# EAGLE board stencil (EAGLE 9.6.2)
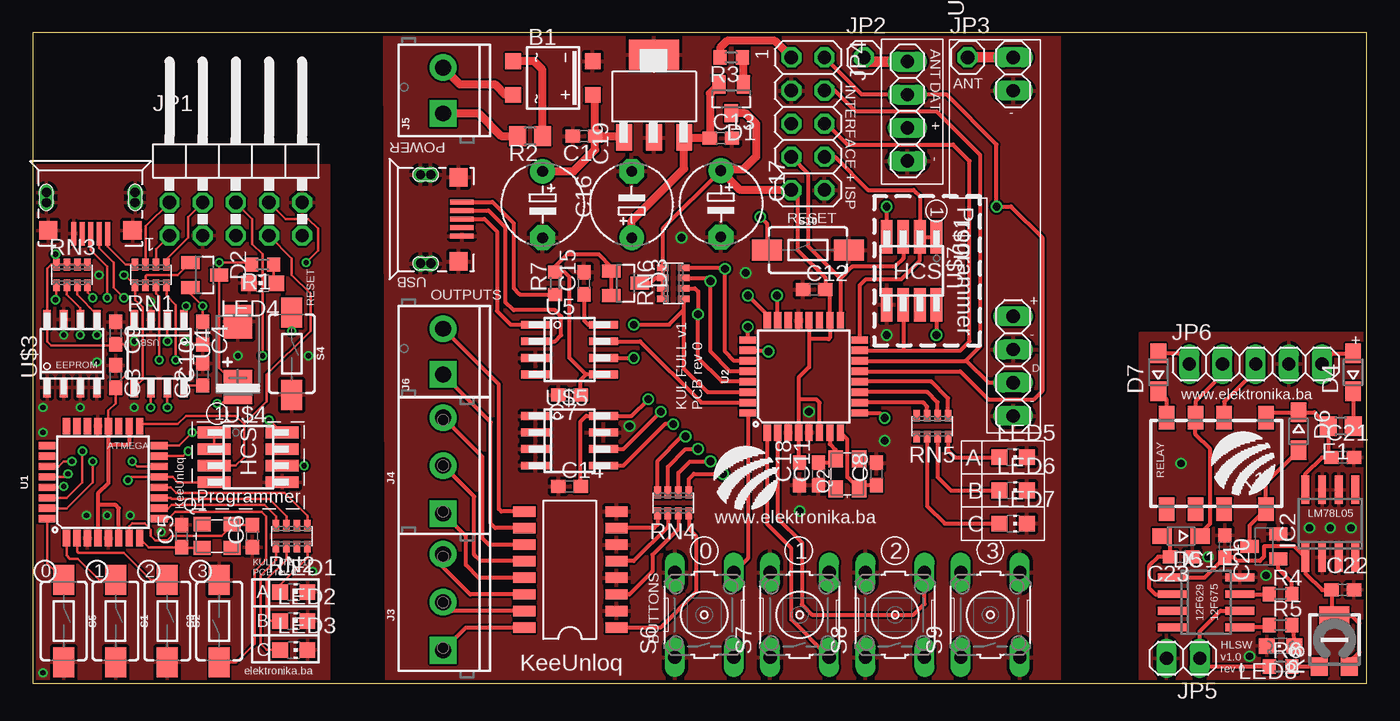
[diagram p0: board, top side]
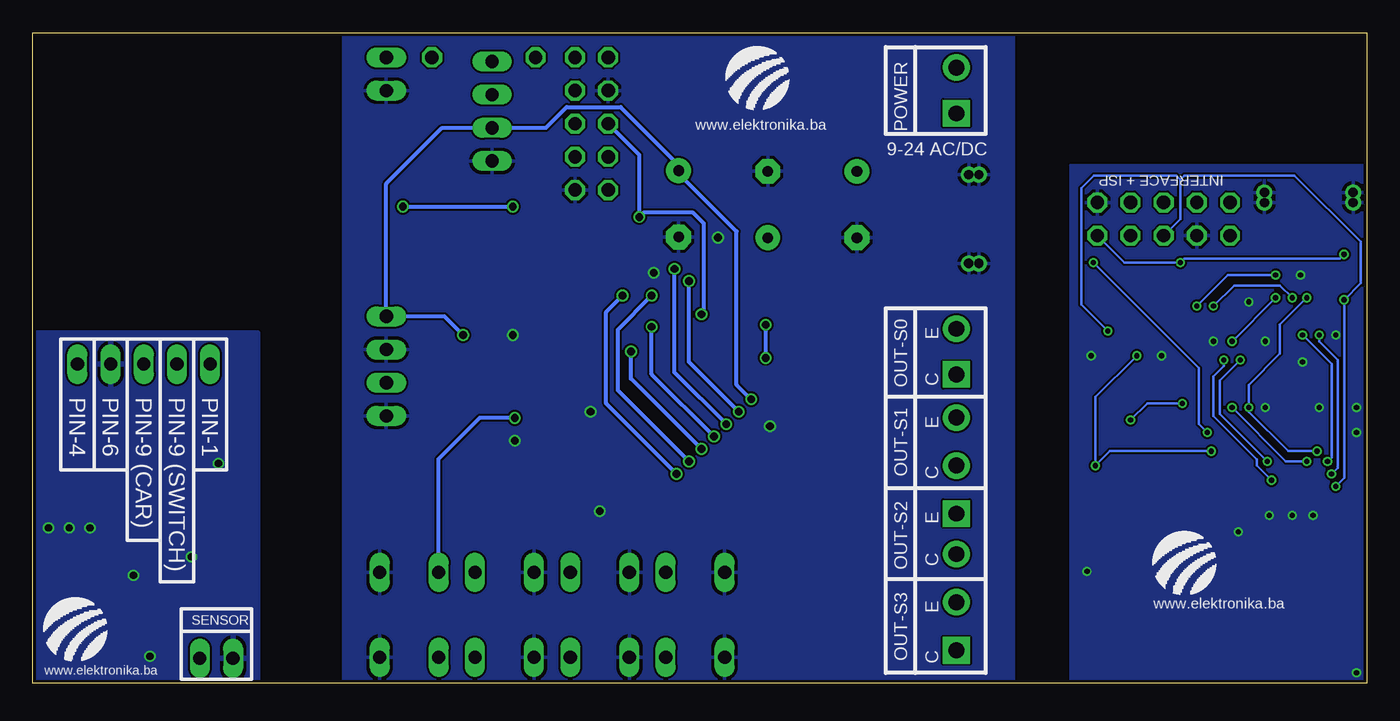
[diagram p1: board, bottom side, seen from below]

Size 102.17 x 49.84 mm. Coordinates in mm from the lower left corner, seen from the top.
Outline: 27.77,0 0,0 0,49.84 27.77,49.84
Outline: 27.78,0 82.86,0
Outline: 82.86,49.84 27.78,49.84
Outline: 82.87,0 102.17,0 102.17,49.84 82.87,49.84
Copper layers (1*16): Top 0.035mm / dielectric 1.5mm / Bottom 0.035mm
Design rules "Fusion_eagle_rule_v1.1": minimum track width 6mil, minimum drill 12mil, track to track 6mil, track to pad 6mil, pad to pad 6mil, via to via 6mil, smd to smd 0mil, copper to edge 10mil, drill to drill 10mil, minimum pad ring 10mil, minimum via ring 6mil, stop-mask expansion 2mil, vias tented up to drill 100mil, thermal gap 10mil

## Footprints (pad centres in the part's own frame; a part is rotated, then mirrored left to right if it is on the bottom)
SOIC-4 = smd 1.2 x 1.2: + 1.3,3.05; - -1.3,3.05; ~1 -1.3,-3.05; ~2 1.3,-3.05
C0603 = smd 1.1 x 1: 1 -0.85,0; 2 0.85,0
CT6032 = smd 2.6 x 2.2: + -2.5,0; - 2.5,0
E5-6 = drill 0.813 pad 1.905: + -2.54,0 | drill 0.813 pad 1.905 octagon: - 2.54,0
SOT23 = smd 1 x 1.4: 1 -0.95,-1.1; 2 0.95,-1.1; 3 0,1.1
SOD323-W = smd 1.5 x 1.2: A 1.45,0; C -1.45,0
R0805 = smd 1.3 x 1.5: 1 -0.95,0; 2 0.95,0
SO-08 = smd 0.6 x 2.2: 1 -1.905,-2.6; 2 -0.635,-2.6; 3 0.635,-2.6; 4 1.905,-2.6; 5 1.905,2.6; 6 0.635,2.6; 7 -0.635,2.6; 8 -1.905,2.6
SO08 = smd 0.6 x 2.2: 1 -1.905,-2.6; 2 -0.635,-2.6; 3 0.635,-2.6; 4 1.905,-2.6; 5 1.905,2.6; 6 0.635,2.6; 7 -0.635,2.6; 8 -1.905,2.6
C40951_USB = smd 1.8 x 0.4: D+ -2.55,0; D- -2.55,-0.65; GND -2.55,1.3; ID -2.55,0.65; VBUS -2.55,-1.3 | drill 0.72 pad 1.2: P$1 -0.17,3.4; P$2 0.61,3.4; P$3 -0.17,-3.4; P$4 0.61,-3.4 | smd 1.4 x 1.4: SHIELD1 -2.3,3.25; SHIELD2 -2.3,-3.2
SCREWTERMINAL-3.5MM-3_LOCK.007S = drill 1.2 pad 2.032 square: 1 -0.178,0 | drill 1.2 pad 2.032: 2 3.5,0; 3 7.178,0
SCREWTERMINAL-3.5MM-2 = drill 1.2 pad 2.032 square: 1 0,0 | drill 1.2 pad 2.032: 2 3.5,0
2X05/90 = drill 1.016 octagon: 1 -5.08,-6.35; 2 -5.08,-3.81; 3 -2.54,-6.35; 4 -2.54,-3.81; 5 0,-6.35; 6 0,-3.81; 7 2.54,-6.35; 8 2.54,-3.81; 9 5.08,-6.35; 10 5.08,-3.81
1X01 = drill 1.016 octagon: 1 0,0
2X05 = drill 1.016 octagon: 1 -5.08,-1.27; 2 -5.08,1.27; 3 -2.54,-1.27; 4 -2.54,1.27; 5 0,-1.27; 6 0,1.27; 7 2.54,-1.27; 8 2.54,1.27; 9 5.08,-1.27; 10 5.08,1.27
1X02 = drill 1.016 long: 1 -1.27,0; 2 1.27,0
1X05 = drill 1.016 long: 1 -5.08,0; 2 -2.54,0; 3 0,0; 4 2.54,0; 5 5.08,0
G6K-2F-Y = smd 1.2 x 1.8: 1 -3.8,-3.5; 2 -0.6,-3.5; 3 1.6,-3.5; 4 3.8,-3.5; 5 3.8,3.5; 6 1.6,3.5; 7 -0.6,3.5; 8 -3.8,3.5
CHIP-LED0805 = smd 1.2 x 1.2: A 0,-1.05; C 0,1.05
CHIPLED_0805 = smd 1.2 x 1.2: A 0,-1.05; C 0,1.05
3.2X2.5_KX-7 = smd 1.3 x 1.1: 1 -1.15,-0.9; 2 1.15,-0.9; 3 1.15,0.9; 4 -1.15,0.9
R0603 = smd 1 x 1.1: 1 -0.85,0; 2 0.85,0
RTRIMCVR42A = smd 1.3 x 1.4: 1 -1.15,-2.05; 3 1.15,-2.05 | smd 2.3 x 1.5: 2 0,1.8
CTS742C083 = smd 0.5 x 0.9: 1 -1.2,-0.8; 2 -0.4,-0.8; 3 0.4,-0.8; 4 1.2,-0.8; 5 1.2,0.8; 6 0.4,0.8; 7 -0.4,0.8; 8 -1.2,0.8
TACTILE_SWITCH_SMD_6.0X3.5MM = smd 2.3 x 1.6: 1 -3.15,0; 2 3.15,0
B3F-10XX = drill 1.016 long: 1 -3.251,2.261; 2 3.251,2.261; 3 -3.251,-2.261; 4 3.251,-2.261
SOT23-BEC = smd 1 x 1.4: B -0.95,-1.1; C 0,1.1; E 0.95,-1.1
TQFP32-08 = smd 1.27 x 0.559: 1 -4.293,2.8; 2 -4.293,2; 3 -4.293,1.2; 4 -4.293,0.4; 5 -4.293,-0.4; 6 -4.293,-1.2; 7 -4.293,-2; 8 -4.293,-2.8; 17 4.293,-2.8; 18 4.293,-2; 19 4.293,-1.2; 20 4.293,-0.4; 21 4.293,0.4; 22 4.293,1.2; 23 4.293,2; 24 4.293,2.8 | smd 0.559 x 1.27: 9 -2.8,-4.293; 10 -2,-4.293; 11 -1.2,-4.293; 12 -0.4,-4.293; 13 0.4,-4.293; 14 1.2,-4.293; 15 2,-4.293; 16 2.8,-4.293; 25 2.8,4.293; 26 2,4.293; 27 1.2,4.293; 28 0.4,4.293; 29 -0.4,4.293; 30 -1.2,4.293; 31 -2,4.293; 32 -2.8,4.293
C308597_LDO = smd 2.3 x 3.8: PGND1 -3.232,-0.036 | smd 2 x 1.2: PGND2 3.118,-0.036; PIN 3.118,-2.336; POUT 3.118,2.264
SOIC8_MINI = smd 0.584 x 1.524: 1 -1.905,-2.6; 2 -0.635,-2.6; 3 0.635,-2.6; 4 1.905,-2.6; 5 1.905,2.6; 6 0.635,2.6; 7 -0.635,2.6; 8 -1.905,2.6
SOIC8 = smd 0.6 x 2.2: 1 -1.905,-2.6; 2 -0.635,-2.6; 3 0.635,-2.6; 4 1.905,-2.6; 5 1.905,2.6; 6 0.635,2.6; 7 -0.635,2.6; 8 -1.905,2.6
SOP-16_4.4MM = smd 0.8 x 1.7: P1 -4.476,-3.591; P2 -3.201,-3.591; P3 -1.926,-3.591; P4 -0.651,-3.591; P5 0.624,-3.591; P6 1.874,-3.591; P7 3.149,-3.591; P8 4.424,-3.591; P9 4.424,3.458; P10 3.149,3.458; P11 1.874,3.458; P12 0.624,3.458; P13 -0.651,3.458; P14 -1.926,3.458; P15 -3.201,3.458; P16 -4.476,3.458
DL-RXC2015 = drill 1.016 long: PANT 27.46,0; PCE 5.08,0; PDATA 2.54,0; PGND1 24.92,0; PGND2 0,0; PVCC 7.62,0
DL-TX1 = drill 1.016 long: PANT 0,0; PDATA 2.54,0; PGND 7.62,0; PVDD 5.08,0
SOIC8_BIG = smd 0.889 x 2.54: 1 -1.905,-2.6; 2 -0.635,-2.6; 3 0.635,-2.6; 4 1.905,-2.6; 5 1.905,2.6; 6 0.635,2.6; 7 -0.635,2.6; 8 -1.905,2.6

## Placement (x,y rotation side)
B1  MB6S  [SOIC-4]  39.85,46.35 270 top
C1  100n  [C0603]  42.23,41.91 180 top
C2  47u/16V  [CT6032]  15.72,25.19 90 top
C3  100n  [C0603]  6.35,23.5 270 top
C4  100n  [C0603]  13.02,26.83 270 top
C5  22p  [C0603]  11.43,11.27 90 top
C6  22p  [C0603]  16.83,11.27 90 top
C7  100n  [C0603]  41.12,22.07 180 top
C8  22p  [C0603]  64.61,16.03 90 top
C9  100n  [C0603]  6.35,26.83 270 top
C10  100n  [C0603]  13.02,23.65 90 top
C11  22p  [C0603]  60.17,16.03 90 top
C12  100n  [C0603]  59.85,30.16 0 top
C13  100n  [C0603]  52.7,41.75 0 top
C14  100n  [C0603]  41.12,15.08 0 top
C15  100n  [C0603]  42.23,30.64 90 top
C16  100u/50V  [E5-6]  39.05,36.67 270 top
C17  100u/50V  [E5-6]  52.7,36.73 270 top
C18  100n  [C0603]  58.74,16.03 90 top
C19  100u/50V  [E5-6]  45.88,36.67 90 top
C20  100n  [C0603]  91.28,10.48 270 top
C21  470n  [C0603]  100.33,17.3 0 top
C22  330n  [C0603]  100.33,7.14 0 top
C23  100n  [C0603]  87.95,9.68 180 top
D1  SDM20E40C-7-F (BAS40-05)  [SOT23]  53.5,44.77 180 top
D2  SDM20E40C-7-F (BAS40-05)  [SOT23]  13.18,31.27 270 top
D3  SDM20E40C-7-F (BAS40-05)  [SOT23]  45.4,30.64 270 top
D4  1N4148  [SOD323-W]  101.12,23.81 90 top
D5  1N4148  [SOD323-W]  87.95,11.27 180 top
D6  1N4148  [SOD323-W]  96.95,19.3 270 top
D7  1N4148  [SOD323-W]  86.2,23.81 90 top
F1  PTC 0.1A 15V  [R0805]  100.17,19.68 180 top
IC1  PIC12F675SN  [SO-08]  89.85,6.19 270 top
IC2  78L05SMD  [SO08]  99.38,12.22 0 top
J1  [C40951_USB]  4.45,36.99 90 top
J2  [C40951_USB]  30.32,35.56 180 top
J3  [SCREWTERMINAL-3.5MM-3_LOCK.007S]  31.43,2.7 90 top
J4  [SCREWTERMINAL-3.5MM-3_LOCK.007S]  31.43,13.18 90 top
J5  [SCREWTERMINAL-3.5MM-2]  31.43,43.66 90 top
J6  [SCREWTERMINAL-3.5MM-2]  31.43,23.65 90 top
JP1  [2X05/90]  15.56,40.64 0 top
JP2  [1X01]  63.66,47.94 0 top
JP3  [1X01]  71.6,47.94 0 top
JP4  [2X05]  59.37,42.86 270 top
JP5  [1X02]  88.11,1.91 180 top
JP6  [1X05]  93.66,24.45 0 top
K1  G6K-2F-Y  [G6K-2F-Y]  90.65,16.83 180 top
LED1  [CHIP-LED0805]  20,6.99 270 top
LED2  [CHIP-LED0805]  20,4.76 270 top
LED3  [CHIP-LED0805]  20,2.54 270 top
LED4  [CHIP-LED0805]  17.62,30.64 90 top
LED5  [CHIP-LED0805]  75.09,17.3 270 top
LED6  [CHIP-LED0805]  75.09,14.76 270 top
LED7  [CHIP-LED0805]  75.09,12.22 270 top
LED8  RED  [CHIPLED_0805]  95.57,2.86 90 top
Q1  16Mz  [3.2X2.5_KX-7]  14.13,11.27 0 top
Q2  16 MHz  [3.2X2.5_KX-7]  62.39,16.03 90 top
R1  1k  [R0603]  17.62,32.07 180 top
R2  22  [R0805]  38.1,41.91 180 top
R3  10  [R0603]  53.5,47.94 180 top
R4  2k2  [R0603]  95.57,6.83 0 top
R5  1k  [R0603]  95.57,4.45 0 top
R6  1k  [R0603]  95.57,1.27 0 top
R7  10  [R0603]  40.01,30.64 90 top
R8  15k  [RTRIMCVR42A]  99.69,3.33 0 top
RN1  10  [CTS742C083]  9.05,31.27 180 top
RN2  220  [CTS742C083]  19.84,11.27 180 top
RN3  4k7  [CTS742C083]  3.02,31.27 0 top
RN4  220  [CTS742C083]  49.05,13.81 180 top
RN5  220  [CTS742C083]  68.9,19.68 180 top
RN6  4k7  [CTS742C083]  49.05,30.64 90 top
S1  MOMENTARY-SWITCH-SPST-SMD-6.0X3.5MM  [TACTILE_SWITCH_SMD_6.0X3.5MM]  6.35,4.76 270 top
S2  MOMENTARY-SWITCH-SPST-SMD-6.0X3.5MM  [TACTILE_SWITCH_SMD_6.0X3.5MM]  10.32,4.76 270 top
S3  MOMENTARY-SWITCH-SPST-SMD-6.0X3.5MM  [TACTILE_SWITCH_SMD_6.0X3.5MM]  14.29,4.76 90 top
S4  MOMENTARY-SWITCH-SPST-SMD-6.0X3.5MM  [TACTILE_SWITCH_SMD_6.0X3.5MM]  19.84,25.24 270 top
S5  MOMENTARY-SWITCH-SPST-SMD-6.0X3.5MM  [TACTILE_SWITCH_SMD_6.0X3.5MM]  2.38,4.76 270 top
S6  [B3F-10XX]  51.44,5.24 90 top
S7  [B3F-10XX]  58.74,5.24 90 top
S8  [B3F-10XX]  66.04,5.24 90 top
S9  [B3F-10XX]  73.34,5.24 90 top
S10  MOMENTARY-SWITCH-SPST-SMD-6.0X3.5MM  [TACTILE_SWITCH_SMD_6.0X3.5MM]  59.37,33.18 0 top
T1  BC546  [SOT23-BEC]  94.3,10.48 90 top
U1  ATMEGA328P_TQFP  [TQFP32-08]  5.4,15.4 90 top
U2  ATMEGA328P_TQFP  [TQFP32-08]  59.05,23.5 90 top
U3  BD450M2FP3-CE2  [C308597_LDO]  47.62,44.93 270 top
U4  CH330NMINI  [SOIC8_MINI]  9.68,25.24 180 top
U5  CH330N  [SOIC8]  41.12,25.56 270 top
U6  LTV-247  [SOP-16_4.4MM]  41.12,8.73 90 top
U$1  DL-RXC2015  [DL-RXC2015]  75.09,20.48 90 top
U$2  DL-TX1  [DL-TX1]  66.99,47.62 270 top
U$3  EEPROMMINI  [SOIC8_MINI]  3.02,25.24 0 top
U$4  SOIC8-BIG  [SOIC8_BIG]  16.51,17.3 270 top
U$5  EEPROM  [SOIC8]  41.12,18.57 270 top
U$6  ELEKTRONIKA_BA_ELEBA_LOGO  [ELEKTRONIKA_BA_ELEBALOGO_ELEBALOGO_B_122]  13.97,9.21 0 bottom
U$7  SOIC8-BIG  [SOIC8_BIG]  67.31,31.59 180 top
U$8  ELEKTRONIKA_BA_ELEBA_LOGO-121  [ELEKTRONIKA_BA_ELEBALOGO_ELEBALOGO_B_121]  54.61,15.72 0 top
U$9  ELEKTRONIKA_BA_ELEBA_LOGO  [ELEKTRONIKA_BA_ELEBALOGO_ELEBALOGO_B_122]  46.67,46.35 0 bottom
U$10  ELEKTRONIKA_BA_ELEBA_LOGO  [ELEKTRONIKA_BA_ELEBALOGO_ELEBALOGO_B_122]  98.9,4.13 0 bottom
U$11  ELEKTRONIKA_BA_ELEBA_LOGO-121  [ELEKTRONIKA_BA_ELEBALOGO_ELEBALOGO_B_121]  92.71,16.83 0 top

## Library data of the parts
B1 = rectifier
C1-C19 = rcl; SPICEPREFIX: C
C20-C23 F1 R4-R6 = rcl
D1-D7 = diode
IC1 = microchip; MF: MICROCHIP; MPN: PIC12F675-E/SN; OC_FARNELL: 9759026; OC_NEWARK: 92C4341
IC2 = linear
J1 J2 U3-U6 U$1-U$5 U$7 = trax_832
J3 J4 = SparkFun-Connectors; PROD_ID: CONN-08288; SF_ID: PRT-08235
J5 J6 = SparkFun-Connectors; PROD_ID: CONN-08399
JP1-JP6 = pinhead
K1 = relay; MF: OMRON COMPONENTS USA; MPN: G6K-2F-Y DC3; OC_FARNELL: 1690316; OC_NEWARK: 89C6451
LED1-LED7 = led
LED8 = adafruit
Q1 Q2 = crystal-geyer_V1_0
R1-R3 R7 = rcl; SPICEPREFIX: R
R8 = resistor
RN1-RN6 = resistor-net; OC_FARNELL: unknown; OC_NEWARK: unknown
S1-S5 S10 = SparkFun-Switches; PROD_ID: SWCH-00815; SF_SKU: COM-08229
S6-S9 = trax_832; MPN: B3F-1000; OC_FARNELL: 176432; OC_NEWARK: 36M3542
T1 = transistor
U1 U2 = SparkFun-IC-Microcontroller; PROD_ID: IC-09069
U$6 U$8-U$11 = elebalogo

## Nets
1-PIN: D7.A JP6.1
4-PIN: D4.A JP6.5
9-CAR: JP6.3 K1.2
9-HLSW: D5.C JP6.2 K1.3
!ENAB: C23.2 D5.A IC1.2
+5V: C2.+ C3.2 C9.2 D2.3 JP1.9 R1.2 RN3.5 RN3.6 RN3.7 RN3.8 U1.4 U1.6 U1.18 U1.20 U$3.8 U$4.8
+5V1: C12.2 C14.2 C17.+ C18.2 D1.3 D3.3 JP4.9 RN6.5 RN6.6 RN6.7 RN6.8 U2.4 U2.6 U2.18 U2.20 U$1.PVCC U$2.PVDD U$5.8 U$7.8
+5V2: C20.2 C22.1 IC1.1 IC2.1 R8.2 R8.3
+12V: C21.1 D6.C F1.2 IC2.8 K1.1
AUX_VCC: D2.1 RN1.6
AUX_VCC1: D1.1 R3.1
BTN1: S5.1 U1.32
BTN2: S1.1 U1.1
BTN3: S2.1 U1.2
BTN4: S3.1 U1.9
BTN5: S6.4 U2.32
BTN6: S7.3 U2.1
BTN7: S8.4 U2.2
BTN8: S9.2 U2.9
GND: C2.- C3.1 C4.2 C5.2 C6.1 C9.1 C10.2 J1.GND J1.P$1 J1.P$2 J1.P$3 J1.P$4 J1.SHIELD1 J1.SHIELD2 JP1.3 JP1.10 LED1.C LED2.C LED3.C LED4.C S1.2 S2.2 S3.2 S4.2 S5.2 U1.3 U1.5 U1.21 U4.3 U$3.1 U$3.2 U$3.3 U$3.4 U$3.7 U$4.5
GND1: B1.- C1.2 C7.2 C8.2 C11.1 C12.1 C13.2 C14.1 C15.2 C16.- C17.- C18.1 C19.- J2.GND J2.P$1 J2.P$2 J2.P$3 J2.P$4 J2.SHIELD1 J2.SHIELD2 JP4.3 JP4.10 LED5.C LED6.C LED7.C S6.1 S6.2 S7.1 S7.2 S8.1 S8.2 S9.3 S9.4 S10.2 U2.3 U2.5 U2.21 U3.PGND1 U3.PGND2 U5.3 U6.P2 U6.P4 U6.P6 U6.P8 U$1.PCE U$1.PGND1 U$1.PGND2 U$2.PGND U$5.1 U$5.2 U$5.3 U$5.4 U$5.7 U$7.5
GND2: C20.1 C21.2 C22.2 C23.1 IC1.8 IC2.2 IC2.3 IC2.6 IC2.7 JP5.2 JP6.4 LED8.C T1.E
LED1: RN2.1 U1.12
LED2: RN2.3 U1.11
LED3: RN2.4 U1.10
LED4: RN5.1 U2.12
LED5: RN5.2 U2.11
LED6: RN5.3 U2.10
MISO: JP1.8 U1.16 U$4.1 U$4.2
MISO1: JP4.8 U2.16 U$7.1 U$7.2
MOSI: JP1.6 U1.15 U$4.6
MOSI1: JP4.6 U2.15 U$7.6
N$1: JP1.2 RN1.3
N$2: JP1.4 RN1.1
N$3: LED2.A RN2.6
N$4: LED1.A RN2.8
N$5: LED4.A R1.1
N$6: RN4.8 U6.P1
N$7: RN4.7 U6.P3
N$8: J1.D+ U4.1
N$9: RN4.6 U6.P5
N$10: RN4.5 U6.P7
N$11: B1.~1 R2.1
N$12: B1.~2 J5.2
N$13: B1.+ C1.1 C16.+ U3.PIN
N$14: J1.D- U4.2
N$15: C13.1 C19.+ D1.2 U3.POUT
N$16: J2.D+ U5.1
N$17: C10.1 U4.8
N$18: J2.D- U5.2
N$19: J2.VBUS R7.1
N$20: C7.1 D3.1 D3.2 R7.2 U5.5
N$21: C15.1 U5.8
N$22: J3.1 U6.P16
N$23: J3.2 U6.P15
N$24: J3.3 U6.P14
N$25: J4.1 U6.P13
N$26: J4.2 U6.P12
N$27: J4.3 U6.P11
N$28: J6.1 U6.P10
N$29: J6.2 U6.P9
N$30: RN4.1 U2.23
N$31: RN4.2 U2.24
N$32: JP2.1 U$2.PANT
N$33: JP3.1 U$1.PANT
N$34: LED3.A RN2.5
N$35: JP1.1 RN1.2
N$36: LED5.A RN5.8
N$37: LED6.A RN5.7
N$38: LED7.A RN5.6
N$39: J5.1 R2.2
N$40: JP4.1 R3.2
N$41: RN4.4 U2.25
N$42: RN4.3 U2.26
N$43: D4.C F1.1
N$44: LED8.A R5.2
N$45: IC1.6 JP5.1 R6.1
N$46: IC1.5 R5.1
N$47: R4.2 T1.B
N$48: IC1.7 R4.1
N$49: D6.A K1.8 T1.C
N$50: D7.C K1.4
N$51: R6.2 R8.1
OSC1: C6.2 Q1.3 U1.7
OSC2: C5.1 Q1.1 U1.8
OSC3: C11.2 Q2.3 U2.7
OSC4: C8.1 Q2.1 U2.8
RESET: JP1.5 RN3.1 S4.1 U1.29
RESET1: JP4.5 RN6.2 S10.1 U2.29
RF_RX: RN1.7 U1.14
RF_RX1: JP4.4 U2.14 U$1.PDATA
RF_TX: RN1.8 U1.13 U$4.4
RF_TX1: JP4.2 U2.13 U$2.PDATA U$7.4
SCK: JP1.7 U1.17 U$4.3
SCK1: JP4.7 U2.17 U$7.3
SCL: RN3.2 U1.28 U$3.6
SCL1: RN6.3 U2.28 U$5.6
SDA: RN3.3 U1.27 U$3.5
SDA1: RN6.4 U2.27 U$5.5
UART_RX: RN3.4 U1.30 U4.6
UART_RX1: RN6.1 U2.30 U5.6
UART_TX: U1.31 U4.7
UART_TX1: U2.31 U5.7
VBUS: J1.VBUS RN1.4
VBUSR: C4.1 D2.2 RN1.5 U4.5

## Tracks (layer width: path | path; a pad name or v marks a point on that pad's centre or on a via)
1-PIN
  Top 0.305: JP6.1 87.77,25.26 D7.A
4-PIN
  Top 0.305: JP6.5 99.56,25.26 D4.A
9-CAR
  Top 0.305: JP6.3 93.66,23.97 91.25,21.55 K1.2
9-HLSW
  Top 0.305: JP6.2 91.12,23.65 89.05,21.58 K1.3 89.05,19.06 90.17,17.94 90.17,12.22 89.4,11.45 D5.C
!ENAB
  Top 0.305: D5.A 87.1,10.67 C23.2 86.2,9.68 85.5,8.98 85.5,7.3 85.97,6.83 IC1.2
+5V  (via drill 0.4)
  Top 0.203: RN3.8 RN3.7 RN3.6 RN3.5 | RN3.8 1.44,32.07 1.11,31.75 U$3.8 1.11,26.19 1.43,25.88 6.25,25.88 C9.2 6.88,25.98 7.3,25.56 7.3,23.81 6.35,22.86 C3.2 6.35,21.43 5.8,20.88 U1.20 | RN3.8 1.82,32.79 v1.75,32.86 | v14.13,21.43 14.46,21.43 C2.+ 15.4,23 15.4,23.01 14.28,24.13 D2.3 14.28,32.22 v14.29,32.23 16.61,32.23 R1.2 | U$4.8 18.16,20.16 v18.1,20.16
  Top 0.305: U1.20 5.8,18.26 | 5.8,18.26 5.8,15.32 5,14.52 5,13.65 | 5,13.65 U1.4 | U1.18 7.4,18.35 7.3,18.26 5.8,18.26 | U1.6 6.6,13.4 6.35,13.65 5,13.65
  Bottom 0.203: v1.75,32.86 2.06,32.54 13.97,32.54 v14.29,32.23 18.57,32.23 JP1.9 | v14.13,21.43 16.83,21.43 v18.1,20.16
+5V1  (via drill 0.6)
  Top 0.305: C18.2 58.66,16.97 U2.4 58.66,21.75 | C14.2 41.97,20.06 42.39,20.48 U$5.8 45.88,20.48 v47.15,21.75 | RN6.6 RN6.5 48.25,34.81 C17.+ | RN6.6 RN6.7 RN6.8 | RN6.6 47.71,31.04 47.31,30.64 D3.3 | U2.20 59.45,26.35 | 59.45,26.35 59.45,24.21 58.66,23.41 58.66,21.75 | 59.45,26.35 60.96,26.35 61.05,26.45 U2.18 61.05,29.81 C12.2 60.7,31.06 58.58,33.18 58.58,37.31 JP4.9 | U2.6 60.26,21.5 60.01,21.75 58.66,21.75 | U$7.8 v69.22,26.67
  Top 0.61: D1.3 54.6,43.67 55.4,42.86 55.4,40.32 54.45,39.37 52.81,39.37 C17.+ 54.19,37.78 JP4.9
  Bottom 0.305: v47.15,21.75 48.26,22.86 48.26,34.61 52.7,39.05 C17.+ 52.7,39.69 57.15,44.13 61.28,44.13 62.87,42.55 U$2.PVDD 70.8,42.55 75.09,38.26 U$1.PVCC 70.64,28.1 v69.22,26.67
+5V2
  Top 0.305: R8.3 100.84,1.63 101.6,2.38 101.6,4.6 101.07,5.13 R8.2 99.48,5.35 C22.1 98.74,7.14 97.47,8.41 IC2.1 96.62,10.48 94.3,10.48 94.3,9.68 93.98,9.37 92.23,9.37 91.97,9.63 C20.2 89.75,8.1 IC1.1
+12V
  Top 0.305: K1.1 94.87,20.75 D6.C 98.16,20.75 F1.2 99.22,17.56 C21.1 98.74,17.3 97.47,16.03 IC2.8
AUX_VCC
  Top 0.203: RN1.6 8.65,31.19 8.73,31.27 11.13,31.27 D2.1
AUX_VCC1
  Top 0.61: D1.1 54.45,47.84 R3.1
BTN1
  Top 0.203: U1.32 1.1,9.19 S5.1
BTN2
  Top 0.203: U1.1 2.6,9.79 2.86,9.53 3.47,9.53 5.08,7.91 S1.1
BTN3
  Top 0.203: U1.2 3.4,10.1 3.49,10 6.96,10 9.05,7.91 S2.1
BTN4
  Top 0.203: S3.1 15.58,1.61 16.99,3.02 16.99,8.57 17.9,9.48 17.9,12.78 17.54,13.13 10.91,13.13 10.38,12.6 U1.9
BTN5
  Top 0.305: U2.32 54.76,9.56 S6.4
BTN6
  Top 0.305: S7.3 58.1,4.88 58.1,10.32 56.26,12.17 U2.1
BTN7
  Top 0.305: U2.2 57.05,12.64 58.9,10.79 58.9,6.03 59.69,5.24 67.47,5.24 68.3,6.07 S8.4
BTN8  (via drill 0.6)
  Top 0.305: U2.9 64.87,20.7 v65.25,20.32
  Bottom 0.305: v65.25,20.32 67.94,20.32 71.12,17.14 71.12,8.53 S9.2
GND  (via drill 0.4)
  other vias: 0.79,0.79 4.13,12.86 7.46,12.86 2.38,26.67 15.72,25.08 21.11,25.08 7.78,21.11 0.79,21.11 5.08,31.27 5.71,12.86 21.43,8.57 4.92,24.61 7.78,26.19 9.05,29.21 9.84,11.59 11.75,26.19 3.65,21.11 0.79,19.21
  pour Bottom: -0.32,39.69 22.7,39.69 22.7,-0.32 -0.32,-0.32
  pour Top: -0.32,39.69 22.7,39.69 22.7,-0.32 -0.32,-0.32
GND1  (via drill 0.6)
  other vias: 65.25,18.57 58.74,13.18 54.61,31.43 65.41,26.67 45.72,19.68 49.69,34.13 59.45,20.8
  pour Bottom: 26.99,50.48 78.42,50.48 78.42,-0.64 26.99,-0.64
  pour Top: 26.99,50.64 78.58,50.64 78.58,-0.79 27.15,-0.79
GND2  (via drill 0.55)
  other vias: 93.19,2.06 90.01,9.68 99.38,11.91 94.46,8.26 87.95,16.83 100.97,11.91 97.79,11.91
  pour Bottom: 84.93,26.83 102.71,26.83 102.71,-0.16 84.93,-0.16
  pour Top: 84.77,26.83 102.71,26.83 102.71,-0.32 84.77,-0.32
LED1
  Top 0.203: U1.12 10.59,15 11,14.59 19.28,14.59 21.04,12.82 RN2.1
LED2
  Top 0.203: U1.11 10.57,14.2 10.64,14.13 18.1,14.13 19.44,12.78 RN2.3
LED3
  Top 0.203: RN2.4 18.64,12.79 17.78,13.65 10.64,13.65 10.38,13.4 U1.10
LED4
  Top 0.305: RN5.1 70.1,21.82 68.82,23.09 U2.12
LED5
  Top 0.305: RN5.2 69.3,21.51 68.51,22.3 U2.11
LED6
  Top 0.305: RN5.3 68.5,21.2 68.2,21.5 U2.10
MISO  (via drill 0.4)
  Top 0.203: U$4.2 U$4.1 v12.22,19.21 11.21,18.2 U1.16 | JP1.8 19.37,35.56 21.11,35.56 21.86,34.82 21.86,33.13 v20.95,32.23
  Bottom 0.203: v12.22,19.21 12.86,19.84 12.86,24.13 v20.95,32.23
MISO1
  Top 0.305: JP4.8 61.44,40.32 63.98,37.78 67.47,37.78 67.94,37.31 U$7.2 | U2.16 63.35,30.49 63.82,30.96 66.52,30.96 67.94,32.38 U$7.2 | U$7.2 U$7.1
MOSI  (via drill 0.4)
  Top 0.203: U$4.6 v20.8,16.67 | JP1.6 16.83,35.56 16.83,33.66 17.62,32.86 v17.62,25.08 | U1.15 11.53,17.4 v11.91,17.78
  Bottom 0.203: v11.91,17.78 19.68,17.78 v20.8,16.67 20.8,21.91 v17.62,25.08
MOSI1
  Top 0.305: U2.15 66.67,25.5 | 66.67,25.5 71.06,25.5 71.75,26.19 71.75,40.01 70.48,41.27 62.39,41.27 60.8,42.86 JP4.6 | U$7.6 66.67,25.5
N$1
  Top 0.203: RN1.3 8.65,35 JP1.2
N$2
  Top 0.203: RN1.1 10.25,32.47 11.91,34.13 11.91,35.72 JP1.4
N$3
  Top 0.203: RN2.6 19.44,9.44 17.94,7.94 17.94,5.08 18.26,4.76 LED2.A
N$4
  Top 0.203: RN2.8 21.04,9.61 18.95,7.52 LED1.A
N$5
  Top 0.203: R1.1 18.47,30.84 LED4.A
N$6
  Top 0.305: RN4.8 50.25,11.82 50.8,11.27 50.8,6.99 48.07,4.25 U6.P1
N$7
  Top 0.305: RN4.7 49.45,11.83 47.47,9.84 47.47,8.57 45.7,6.81 U6.P3
N$8  (via drill 0.4)
  Top 0.203: J1.D+ 4.45,33.18 5.71,31.91 v5.71,29.53 | U4.1 11.59,28.73 v11.75,28.89
  Bottom 0.203: v11.75,28.89 10.16,30.48 6.67,30.48 v5.71,29.53
N$9
  Top 0.305: RN4.6 48.65,11.98 46.03,9.36 U6.P5
N$10
  Top 0.305: RN4.5 47.85,12.13 47.6,11.88 U6.P7
N$11
  Top 0.61: R2.1 39.05,46.99 38.39,47.66 B1.~1
N$12
  Top 0.61: J5.2 32.71,45.88 35.4,45.88 36.23,45.05 B1.~2
N$13
  Top 0.305: 45.23,41.91 U3.PIN
  Top 0.61: C1.1 43.08,44.87 B1.+ | C1.1 45.23,41.91 | C1.1 43.08,40.85 41.43,39.21 C16.+
N$14  (via drill 0.4)
  Top 0.203: v6.99,29.53 6.19,30.32 6.19,32.23 5.08,33.34 5.08,34.42 J1.D- | v10.32,26.19 U4.2
  Bottom 0.203: v10.32,26.19 v6.99,29.53
N$15
  Top 0.61: C19.+ 45.88,35.4 49.89,39.41 U3.POUT 49.95,41.75 C13.1 51.85,45.17 D1.2
N$16
  Top 0.305: J2.D+ 34.61,35.56 35.56,34.61 35.56,28.52 36.61,27.46 U5.1
N$17
  Top 0.203: U4.8 11.75,22.8 C10.1
N$18
  Top 0.305: J2.D- 34.91,36.21 36.2,34.92 36.2,29.21 36.83,28.57 40.01,28.57 40.48,28.1 40.48,26.67 40.01,26.19 U5.2
N$19
  Top 0.305: J2.VBUS 35.21,36.86 36.83,35.24 36.83,30.27 37.31,29.79 R7.1
N$20
  Top 0.305: C7.1 41.97,23.23 42.39,23.65 | D3.2 D3.1 44.3,31.9 43.34,32.86 40.96,32.86 40.01,31.91 R7.2 40.74,31.49 41.12,31.11 41.12,24.92 42.39,23.65 | U5.5 42.39,23.65
N$21
  Top 0.305: C15.1 42.23,27.78 42.55,27.46 U5.8
N$22
  Top 0.305: U6.P16 33.17,4.25 J3.1
N$23
  Top 0.305: U6.P15 32.1,5.53 J3.2
N$24
  Top 0.305: U6.P14 33.52,6.81 31.43,8.89 J3.3
N$25
  Top 0.305: U6.P13 34.15,8.08 33.18,9.05 33.18,11.25 J4.1
N$26
  Top 0.305: U6.P12 34.3,9.36 33.81,9.84 33.81,14.29 J4.2
N$27
  Top 0.305: U6.P11 34.96,10.61 34.45,11.11 34.45,17.34 J4.3
N$28
  Top 0.305: U6.P10 35.43,11.88 35.08,12.22 35.08,20 J6.1
N$29
  Top 0.305: U6.P9 35.9,13.15 35.72,13.34 35.72,22.87 J6.2
N$30  (via drill 0.6)
  Top 0.305: RN4.1 50.25,15.65 50.64,16.03 v52.86,16.03 | U2.23 57.05,29.62 v56.99,29.69
  Bottom 0.305: v52.86,16.03 58.26,21.43 58.26,28.42 v56.99,29.69
N$31  (via drill 0.6)
  Top 0.305: U2.24 56.26,28.2 v54.77,29.69 | RN4.2 49.45,16.12 50.32,16.99 v51.91,16.99
  Bottom 0.305: v51.91,16.99 57.36,22.44 57.36,27.09 v54.77,29.69
N$32
  Top 0.813: U$2.PANT 63.98,47.62 JP2.1
N$33
  Top 0.813: U$1.PANT JP3.1
N$34
  Top 0.203: RN2.5 18.64,9.44 17.46,8.26 17.46,3.02 17.94,2.54 LED3.A
N$35
  Top 0.203: RN1.2 9.45,33.26 JP1.1
N$36
  Top 0.305: RN5.8 70.1,17.85 70.64,17.3 LED5.A
N$37
  Top 0.305: RN5.7 69.3,15.79 70.33,14.76 LED6.A
N$38
  Top 0.305: RN5.6 68.5,13.58 69.85,12.22 LED7.A
N$39
  Top 0.61: J5.1 34.13,43.66 35.88,41.91 R2.2
N$40
  Top 0.61: R3.2 52.65,48.68 53.18,49.21 56.83,49.21 JP4.1
N$41  (via drill 0.6)
  Top 0.305: U2.25 v54.76,27.3 v54.77,27.3 | RN4.4 47.85,17.05 49.7,18.89 v50.01,18.89
  Bottom 0.305: v50.01,18.89 54.77,23.65 v54.77,27.3
N$42  (via drill 0.6)
  Top 0.305: U2.26 56.26,25.5 v56.36,25.4 | RN4.3 48.65,16.59 50.01,17.94 v50.96,17.94
  Bottom 0.305: v50.96,17.94 56.36,23.34 v56.36,25.4
N$43
  Top 0.305: D4.C F1.1
N$44
  Top 0.305: R5.2 96.59,4.27 LED8.A
N$45
  Top 0.305: R6.1 90.01,1.27 JP5.1 89.38,3.97 90.96,5.56 IC1.6 | IC1.6 92.87,5.56 93.03,5.4 92.61,5.4 IC1.6
N$46
  Top 0.305: R5.1 94.56,4.29 IC1.5
N$47
  Top 0.305: R4.2 96.42,7.72 95.4,8.74 T1.B
N$48
  Top 0.305: IC1.7 R4.1
N$49
  Top 0.305: T1.C 93.2,12.08 K1.8 94.45,15.35 D6.A
N$50
  Top 0.305: K1.4 86.85,21.72 D7.C
N$51
  Top 0.305: R8.1 R6.2
OSC1
  Top 0.203: C6.2 15.33,12.12 | 15.33,12.12 Q1.3 | U1.7 7.4,12 7.62,12.22 8.57,12.22 9.05,11.75 9.05,11.27 9.37,10.95 10.32,10.95 10.64,11.27 14.48,11.27 15.33,12.12
OSC2
  Top 0.203: Q1.1 11.48,10.37 C5.1 8.88,10.42 U1.8
OSC3
  Top 0.305: U2.7 61.05,18.32 61.49,17.89 Q2.3 61.19,16.88 C11.2
OSC4
  Top 0.305: U2.8 62.39,18.67 62.39,15.78 Q2.1 63.59,15.18 C8.1
RESET  (via drill 0.4)
  Top 0.203: RN3.1 1.82,29.44 v1.75,29.37 | S4.1 v19.84,26.99 | U1.29 2.3,15 v2.38,15.08
  Bottom 0.203: 14.29,38.58 14.29,35.56 JP1.5 | v19.84,26.99 21.86,29 21.86,37.94 20.9,38.89 14.61,38.89 14.29,38.58 | v2.38,15.08 1.75,15.72 v1.75,29.37 0.48,30.64 0.48,33.81 5.56,38.89 13.97,38.89 14.29,38.58
RESET1  (via drill 0.6)
  Top 0.305: U2.29 52.79,23.09 50.96,24.92 v50.96,28.26 50.96,30 50.72,30.24 RN6.2 | v55.72,35.72 56.22,35.22 S10.1
  Bottom 0.305: v50.96,28.26 50.8,28.42 50.8,35.24 51.59,36.04 55.4,36.04 v55.72,35.72 55.72,40.48 JP4.5
RF_RX  (via drill 0.4)
  Top 0.203: RN1.7 9.45,29.84 9.68,29.6 v9.68,24.77 | U1.14 8.01,16.6 v7.62,16.99
  Bottom 0.203: v9.68,24.77 11.27,23.18 11.27,20.64 v7.62,16.99
RF_RX1
  Top 0.305: U2.14 71.44,24.7 | 71.44,24.7 71.51,24.7 73.18,23.02 U$1.PDATA | JP4.4 61.44,45.4 63.02,43.81 69.22,43.81 72.55,40.48 72.55,25.81 71.44,24.7
RF_TX  (via drill 0.4)
  Top 0.203: U$4.4 11.11,15.4 10.71,15.8 U1.13 7.54,15.8 v7.3,15.56 | RN1.8 10.25,29.68 10.95,28.98 v10.95,24.77
  Bottom 0.203: v10.95,24.77 10.95,24.29 11.75,23.5 11.75,20.48 8.41,17.14 8.41,16.67 v7.3,15.56
RF_TX1  (via drill 0.6)
  Top 0.305: U2.13 71.04,23.89 73.18,21.75 76.68,21.75 77.31,22.38 77.31,34.13 74.93,36.51 v73.82,36.51 73.82,41.27 70.01,45.09 U$2.PDATA 63.5,45.09 JP4.2 | U$7.4 v65.41,36.51
  Bottom 0.305: v73.82,36.51 v65.41,36.51
SCK
  Top 0.203: JP1.7 19.84,32.54 19.84,31.27 21.27,29.84 21.27,26.99 17.94,23.65 17.94,21.59 16.19,19.84 | U1.17 8.35,19.84 11.11,19.84 11.75,20.48 15.56,20.48 16.19,19.84 | 16.19,19.84 16.19,17.3 15.56,16.67 U$4.3
SCK1
  Top 0.305: 61.85,31.01 U2.17 | JP4.7 59.37,39.05 59.37,33.5 61.85,31.01 | U$7.3 66.67,32.54 66.04,31.91 62.75,31.91 61.85,31.01
SCL  (via drill 0.4)
  Top 0.203: v3.65,26.67 U$3.6 3.65,28.73 2.62,29.77 RN3.2 | U1.28 2.46,15.8 v2.7,16.03
  Bottom 0.203: v2.7,16.03 2.22,16.51 2.22,24.77 3.65,26.19 v3.65,26.67
SCL1  (via drill 0.6)
  Top 0.305: U$5.6 45.24,17.94 v48.1,20.8 | U2.28 53.42,23.89 51.91,25.4 v51.91,30.8 51.67,31.04 RN6.3
  Bottom 0.305: v48.1,20.8 51.91,24.61 v51.91,30.8
SDA  (via drill 0.4)
  Top 0.203: v4.92,26.67 U$3.5 4.92,28.26 3.42,29.76 RN3.3 | U1.27 1.99,16.6 2.38,16.99 v3.02,16.99
  Bottom 0.203: v3.02,16.99 2.7,17.3 2.7,24.45 v4.92,26.67
SDA1  (via drill 0.6)
  Top 0.305: U$5.5 45.24,16.67 48.42,19.84 v49.05,19.84 | U2.27 53.73,24.7 53.02,25.4 v53.02,31.75 52.93,31.84 RN6.4
  Bottom 0.305: v49.05,19.84 53.02,23.81 v53.02,31.75
UART_RX  (via drill 0.4)
  Top 0.203: U4.6 v9.05,21.11 | U1.30 2.61,14.2 3.81,15.4 v3.81,17.78 | RN3.4 4.22,29.91 v4.6,29.53
  Bottom 0.203: v3.81,17.78 6.03,17.78 9.05,20.8 v9.05,21.11 9.05,22.86 6.67,25.24 6.67,27.46 v4.6,29.53
UART_RX1  (via drill 0.6)
  Top 0.305: U2.30 51.68,22.3 49.85,24.12 49.85,28.57 | U5.6 v46.04,24.92 | RN6.1 49.85,28.57 | 49.85,28.57 48.74,27.46 v46.04,27.46
  Bottom 0.305: v46.04,27.46 v46.04,24.92
UART_TX  (via drill 0.4)
  Top 0.203: U4.7 v10.32,21.11 | U1.31 2.6,13.4 4.6,15.4 v4.6,16.99
  Bottom 0.203: v4.6,16.99 6.19,16.99 v10.32,21.11
UART_TX1
  Top 0.305: U5.7 46.51,26.19 51.21,21.5 U2.31
VBUS
  Top 0.203: J1.VBUS 5.75,33.47 7.14,32.07 RN1.4
VBUSR  (via drill 0.4)
  Top 0.203: v6.99,31.27 7.05,31.27 RN1.5 7.85,29.36 8.41,28.8 8.41,23.28 U4.5 | C4.1 v13.02,28.89 12.08,29.83 D2.2
  Bottom 0.203: v6.99,31.27 10.64,31.27 v13.02,28.89

## Text on the board
_tsilk: ANT | 1 | INTERFACE + ISP | DAT | ANT | + | - | POWER | - | 1 | Programmer | RESET | 1 | USB | HCS | RESET | OUTPUTS | + | USB | - | + | EEPROM | D | www.elektronika.ba | KUL FULL v1 / PCB rev 0 | - | 1 | ATMEGA | A | HCS | RELAY | Programmer | B | KeeUnloq | LM78L05 | www.elektronika.ba | C | 0 | 1 | 2 | 3 | 0 | 1 | 2 | 3 | KUL LITE v1 / PCB rev 0 | A | 12F629 | 12F675 | B | BUTTONS | C | elektronika.ba | KeeUnloq | HLSW / v1.0 / rev 0
_bsilk: POWER | www.elektronika.ba | 9-24 AC/DC | INTERFACE + ISP | OUT-S0 | E | C | PIN-1 | PIN-9 (SWITCH) | PIN-9 (CAR) | PIN-6 | PIN-4 | OUT-S1 | E | C | OUT-S2 | E | C | OUT-S3 | www.elektronika.ba | E | SENSOR | C | www.elektronika.ba